# Altium PCB CH32x203C-R1-1v0.PcbDoc
Units mil, origin at the board's own origin, x right, y up, seen from the top; angles counter-clockwise.
Board outline 3733 x 2649.61 mil, 2 copper layers (TopLayer, BottomLayer); 72 components, 72 nets, 336 pads, 444 vias.
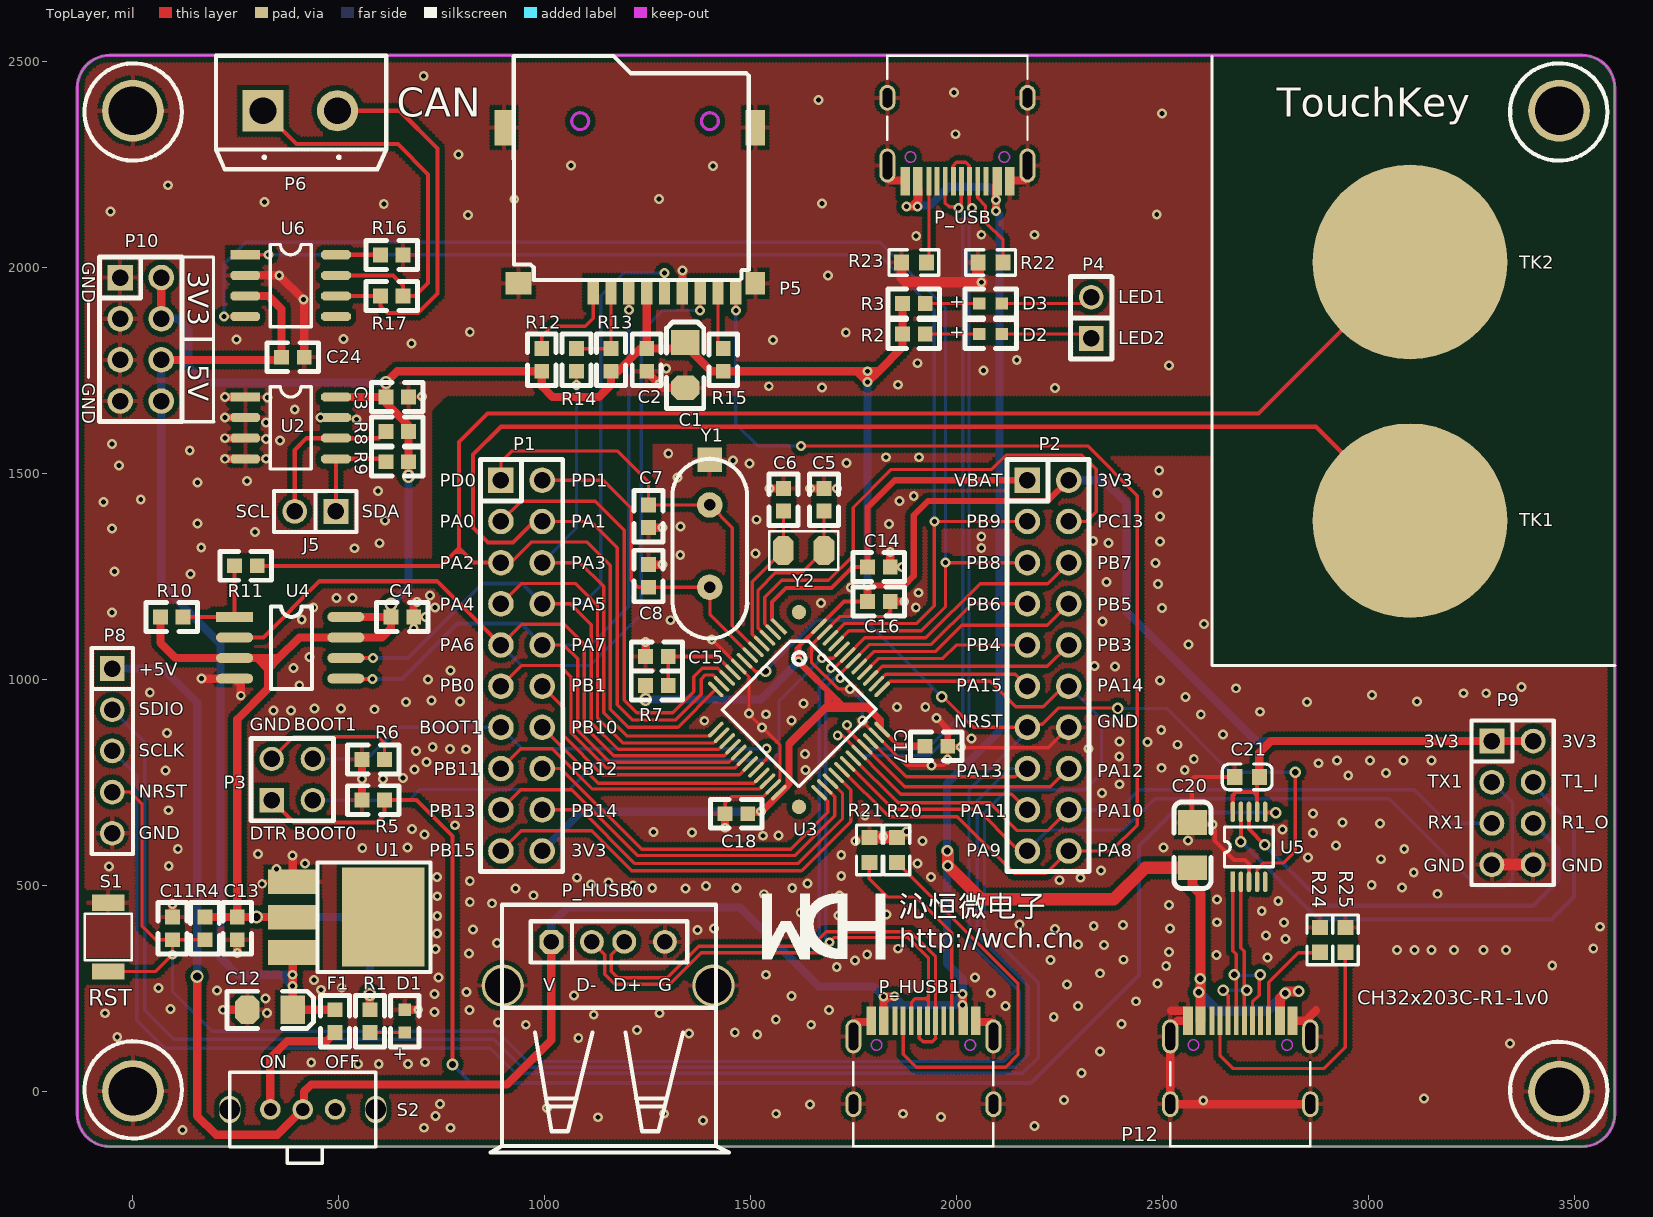
[diagram p0: TopLayer view]
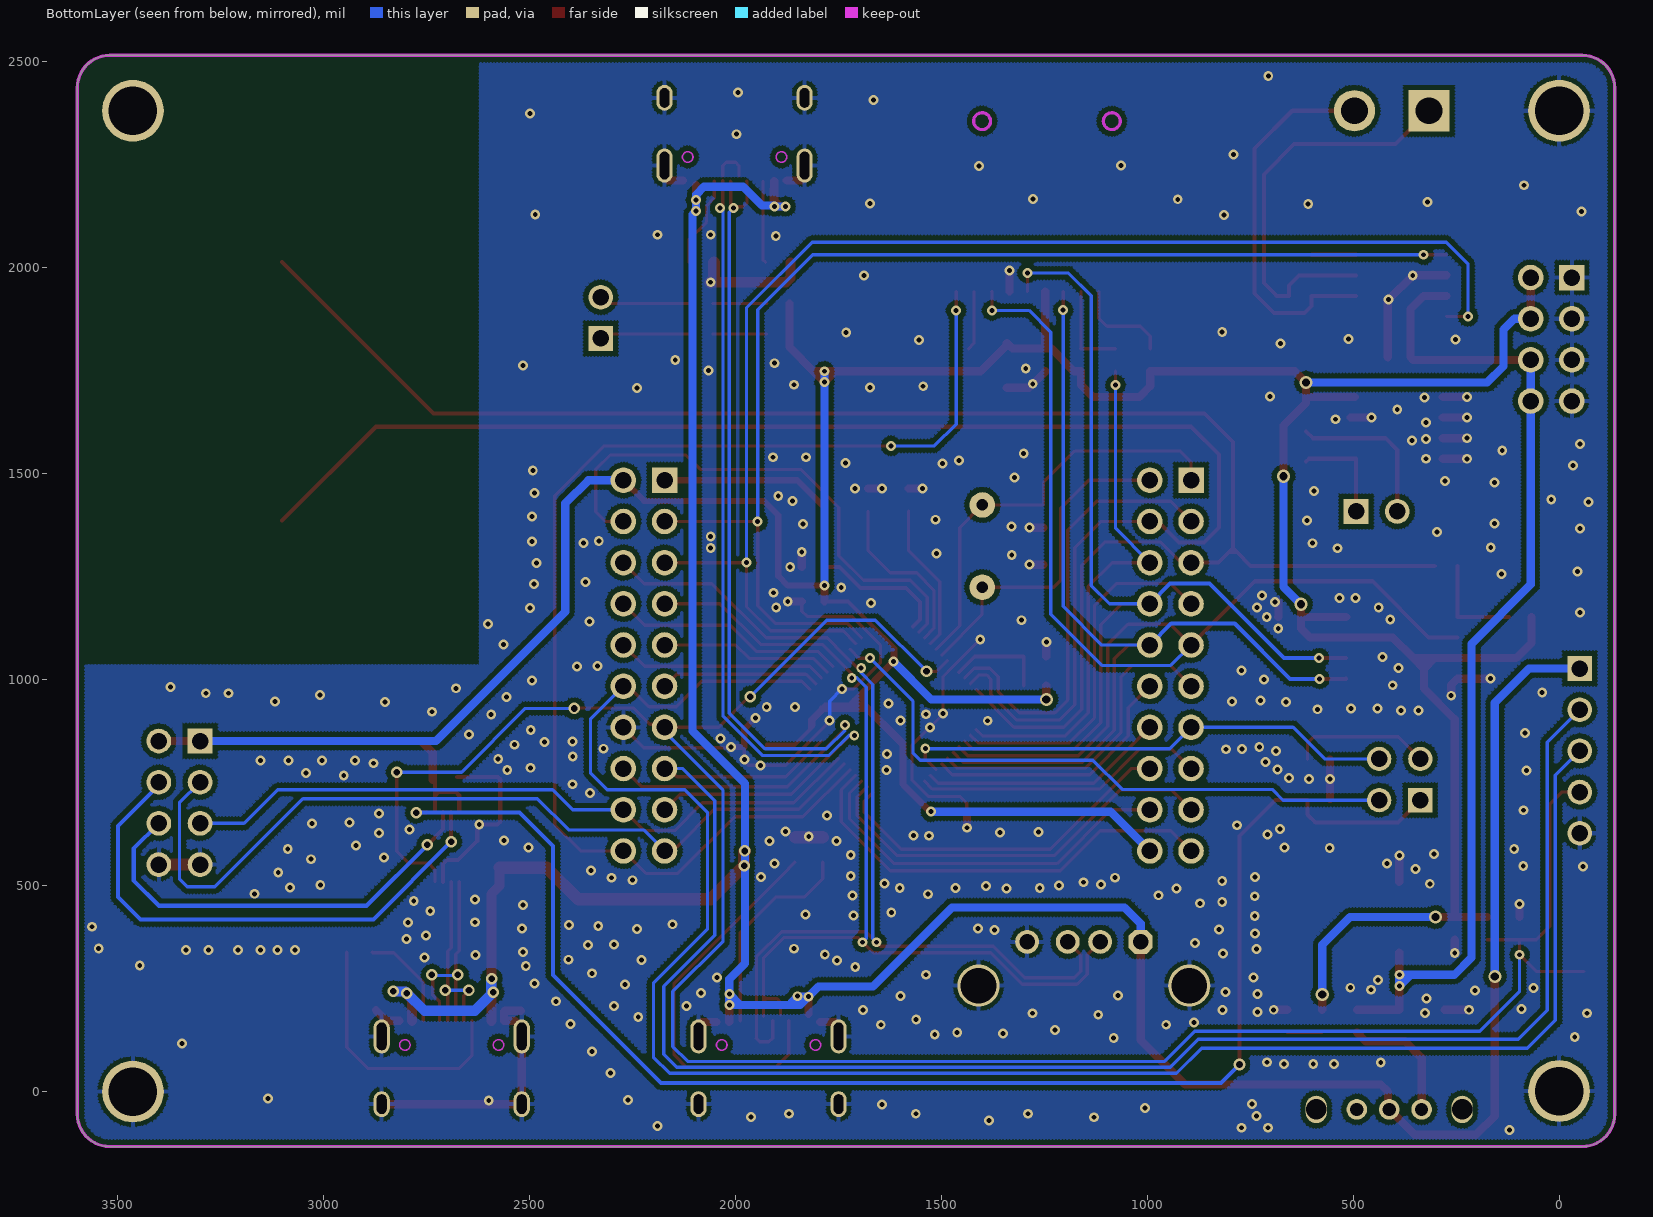
[diagram p1: BottomLayer view, seen from below]

## Layer stack, top to bottom
TopSolder: solder mask 0.4, Solder Resist, Dk 3.5
TopLayer: signal copper 1.4
Dielectric1: dielectric 12.6, FR-4, Dk 4.8
BottomLayer: signal copper 1.4
BottomSolder: solder mask 0.4, Solder Resist, Dk 3.5

## Board outline
-135,-55.87 ccw(c-56.26,-55.87) -56.26,-134.61 3519.26,-134.61 ccw(c3519.26,-55.87) 3598,-55.87 3598,2436.26 ccw(c3519.26,2436.26) 3519.26,2515 -56.26,2515 ccw(c-56.26,2436.26) -135,2436.26

## Design rules (kind name [scope] priority, off if disabled: settings)
Clearance Clearance_1 [InPolygon] p1: gap=12 ignorepadtopadclearanceinfootprint=FALSE
Clearance [All] p2: gap=6 ignorepadtopadclearanceinfootprint=FALSE except(0: Arc-Hole Track-Hole SMDPad-Hole THPad-Hole Via-Hole Fill-Hole Poly-Hole Region-Hole Text-Hole)
ComponentClearance [All] p1 off: gap=10 collisioncheckmode=3 verticalgap=10 showdistances=FALSE
DiffPairsRouting [All] p1: maxlimit=8 minlimit=8 mostfreqgap=8 toplayer_minwidth=15 toplayer_maxwidth=15 toplayer_prefwidth=15 bottomlayer_minwidth=15 bottomlayer_maxwidth=15 bottomlayer_prefwidth=15 substack1={BC7F94EC-5DE3-48DF-A731-132A3A7410ED} toplayer_{bc7f94ec-5de3-48df-a731-132a3a7410ed}_minwidth=15 toplayer_{bc7f94ec-5de3-48df-a731-132a3a7410ed}_maxwidth=15 toplayer_{bc7f94ec-5de3-48df-a731-132a3a7410ed}_prefwidth=15 bottomlayer_{bc7f94ec-5de3-48df-a731-132a3a7410ed}_minwidth=15 bottomlayer_{bc7f94ec-5de3-48df-a731-132a3a7410ed}_maxwidth=15 bottomlayer_{bc7f94ec-5de3-48df-a731-132a3a7410ed}_prefwidth=15 maxuncoupledlength=500
FabricationTestPointUsage TestPointUsage [All] p1: valid=0 allowmultiple=FALSE
FabricationTestpoint Testpoint [All] p1: side=3 testpointundercomponent=TRUE minsize=40 maxsize=100 preferedsize=60 minholesize=20 maxholesize=40 preferedholesize=32 testpointgrid=1 allowsidetop=TRUE allowsidebottom=TRUE usegrid=TRUE gridtolerance=0.01
FanoutControl Fanout_LCC [All] p1 off: bgadir=Out bgaviamode=Centered fanoutstyle=Auto fanoutdirection=Alternating viagrid=1 // Protel DXP Scope 1 Expression Was: IsLCC   Fanout_LCC (Default Rule)
FanoutControl Fanout_BGA [All] p2 off: bgadir=Out bgaviamode=Centered fanoutstyle=Auto fanoutdirection=Alternating viagrid=1 // Protel DXP Scope 1 Expression Was: IsBGA   Fanout_BGA (Default Rule)
FanoutControl Fanout_SOIC [All] p3 off: bgadir=Out bgaviamode=Centered fanoutstyle=Auto fanoutdirection=Alternating viagrid=1 // Protel DXP Scope 1 Expression Was: IsSOIC   Fanout_SOIC (Default Rule)
FanoutControl Fanout_Default [All] p4: bgadir=Out bgaviamode=Centered fanoutstyle=Auto fanoutdirection=Alternating viagrid=1 // Fanout_Default (Default Rule)
FanoutControl Fanout_Small [All] p5 off: bgadir=Out bgaviamode=Centered fanoutstyle=Auto fanoutdirection=Alternating viagrid=1 // Protel DXP Scope 1 Expression Was: (CompPinCount < 5)   Fanout_Small (Default Rule)
HoleSize [All] p1 off: absolutevalues=TRUE maxlimit=100 minlimit=1 maxpercent=80.000 minpercent=20.000
PolygonConnect PolygonConnect_1 [IsVia] p1: connectstyle=Direct reliefconductorwidth=10 reliefentries=4 polygonreliefangle="90 Angle" airgapwidth=10
PolygonConnect [All] p2: connectstyle=Relief reliefconductorwidth=10 reliefentries=4 polygonreliefangle="90 Angle" airgapwidth=10
RoutingVias [All] p1: holewidth=20 width=24 viastyle="Through Hole" minholewidth=12 minwidth=24 maxholewidth=20 maxwidth=35
SilkToSolderMaskClearance SilkscreenOverComponentPads [All] p1: minsilkscreentomaskgap=10 clearancetoexposedcopper=TRUE
SolderMaskExpansion [All] p1: expansion=4 istentingtop=FALSE
Width Width_1 [InNet('GND')] p1: maxlimit=30 minlimit=6 preferedwidth=15 substack1={BC7F94EC-5DE3-48DF-A731-132A3A7410ED}
Width Width_2 [InNetClass('VCC')] p2: maxlimit=30 minlimit=6 preferedwidth=15 substack1={BC7F94EC-5DE3-48DF-A731-132A3A7410ED}
Width [All] p3: maxlimit=220 minlimit=6 preferedwidth=9 substack1={BC7F94EC-5DE3-48DF-A731-132A3A7410ED}
19 further rules are at their usual default settings.

## Components (designator, comment, footprint, x,y, rotation, side; value= is the part's Value field where it differs from the comment)
C1 "NC(10uF)" 3216 1341.05,1817.57 r90 top value=10uF/16V
C2 "0.1uF" 0603#1 1247.55,1802.77 r270 top
C3 "NC(0.1uF)" 0603#1 669.29,1685.24 r180 top
C4 "0.1uF" 0603#1 681.89,1151.39 r180 top
C5 "12pF" 0603#1 1678,1408.39 r90 top
C6 "12pF" 0603#1 1579.6,1408.39 r90 top
C7 "22pF" 0603#1 1252.17,1368.1 r90 top
C8 "22pF" 0603#1 1252.17,1278.2 r270 top
C11 "0.1uF" 0603#1 96,422.39 r270 top
C12 "10uF" 3216 388,197.39 r0 top
C13 "10uF" 0603#1 253.36,422.39 r270 top
C14 "0.1uF" 0603#1 1784,1272.39 r0 top
C15 "0.1uF" 0603#1 1300,1055.39 r180 top
C16 "0.1uF" 0603#1 1839,1188.79 r180 top
C17 "0.1uF" 0603#1 1978.6,837.39 r180 top
C18 "0.1uF" 0603#1 1438,673.39 r0 top
C20 "NC(10uF)" 3216_C 2573,652 r90 top
C21 "NC(0.1uF)" 0603_C 2736,763 r180 top
C24 "NC(0.1uF)" 0603#1 416,1782 r180 top
D1 "POWER" 0603L 660,142.39 r90 top
D2 "LED1   blue" 0603L 2055,1838.27 r0 top
D3 "LED2  blue" 0603L 2055,1912.27 r0 top
F1 "500mA" 0603#1 491,142.39 r90 top
J5 "Header 2" "SIP2 - 40mil" 493,1407.33 r180 top
P1 "Header 10X2" IDC20 893.7,1483.09 r270 top
P2 "Header 10X2" IDC20 2172,1483.09 r270 top
P3 "Header 2X2" HDR2X2 337,706.39 r0 top
P4 "Header 2" "SIP2 - 40mil" 2327,1827.39 r90 top
P5 "TF_自弹" TF_CARD 1117.65,1941.67 r0 top
P6 "Header 2" "PORT2 4.5MM" 316,2380.39 r270 top
P8 "Header 5" "SIP5 - 40mil" -50,1026 r270 top
P9 "HEADER 4x2" IDC8-2.54mm 3300,850 r0 top
P10 "Header 4X2" IDC8 -31,1975.39 r0 top
P12 "TYPE-C" TYPE-C-Receptacle-2.0 2688.92,171 r0 top
P_HUSB0 "USB_A" USBA-l 1016,362.39 r0 top
P_HUSB1 "TYPE-C" TYPE-C-Receptacle-2.0 1919.5,171 r0 top
P_USB "TYPE-C" TYPE-C-Receptacle-2.0 2002.1,2209 r180 top
R1 "1K" 0603#1 575.5,142.39 r90 top
R2 "1K" 0603#1 1869,1838.27 r0 top
R3 "1K" 0603#1 1869,1912.27 r0 top
R4 "10K" 0603#1 174.68,367.39 r90 top
R5 "10K" 0603#1 611,706.39 r180 top
R6 "10K" 0603#1 611,805.39 r180 top
R7 "0Ω" 0603#1 1245,985 r0 top
R8 "NC(10K)" 0603#1 669.29,1601.74 r180 top value=10K
R9 "NC(10K)" 0603#1 669.29,1528.24 r180 top value=10K
R10 "10K" 0603#1 122,1151.39 r180 top
R11 "NC(0Ω)" 0603#1 247,1275.39 r0 top
R12 "NC(10K)" 0603#1 992.75,1802.77 r270 top
R13 "NC(10K)" 0603#1 1161.15,1802.77 r270 top
R14 "NC(0Ω)" 0603#1 1076.95,1802.77 r270 top
R15 "NC(10K)" 0603#1 1433.55,1747.77 r90 top
R16 "NC(0Ω)" 0603#1 656.17,2030 r180 top
R17 "NC(120Ω)" 0603#1 656.17,1930.7 r180 top
R20 "NC(5.1K)" 0603#2 1855.1,555.43 r90 top
R21 "NC(5.1K)" 0603#2 1788.1,555.43 r90 top
R22 "NC(5.1K)" 0603#2 2112.81,2012 r180 top
R23 "NC(5.1K)" 0603#2 1926.81,2012 r180 top
R24 "NC(5.1K)" 0603#2 2882,337 r90 top
R25 "NC(5.1K)" 0603#2 2944,337 r90 top
S1 "KEY" 贴片按键 -60,290.39 r90 top
S2 "SW" KEY2 255,-44.61 r0 top
TK1 "KEY6" KEY68 3101,1424.39 r90 top
TK2 "KEY7" KEY68 3101,2052.39 r90 top
U1 "1117_3V3" SOT-223 388,508.39 r270 top
U2 "NC(24C02)" SOP8 273.2,1685.24 r270 top
U3 "CH32F203CxT" LQFP48 1568.6,1128.39 r225 top
U4 "W25Q16" "016 SO-8" 257,1151.39 r0 top
U5 "NC(CH340X)" MSOP10 2670.63,508 r0 top
U6 "NC(TJA1050)" SOP8 273.2,2030.7 r270 top
Y1 "8M" XT62/28 1400.47,1223.2 r0 top
Y2 "32.768k" FC-135 1678,1312.39 r180 top

## Footprints (in the part's own frame and the unit in brackets; to place one, negate y for a bottom-side part, rotate by r counter-clockwise, add the part's x,y. Pads: shape width x height; smd on the part's side, far side on the other; paste and mask are expansions set on the pad)
"016 SO-8" [mil]
  rect 90x24 smd: 1(-10,0)
  oval 90x24 smd: 2(-10,-50) 3(-10,-100) 4(-10,-150) 5(260,-150) 6(260,-100) 7(260,-50) 8(260,0)
  silkscreen extent 78,-175 178,25
0603#1 [mil]
  rect 36x36 smd: 1(0,0) 2(55,0)
  silkscreen extent -35,-35 90,35
0603#2 [mil]
  rect 36.61x38.58 smd: 1(0,0) 2(60.63,0)
  silkscreen extent -30,-31 91,31
0603_C [mm]
  rect 0.93x0.98 smd: 1(0,0) 2(1.54,0)
  silkscreen extent -0.76,-0.79 2.31,0.79
0603L [mil]
  rect 30x30 smd: 1(0,0) 2(55,0)
  silkscreen extent -35,-35 90,35
3216 [mil]
  rect 60x70 smd: 1(0,0)
  oct 60x70 smd: 2(-110,0)
  silkscreen extent -160,-45 50,45
3216_C [mil]
  rect 60x70 smd: 1(0,0) 2(-110,0)
  silkscreen extent -160,-45 50,45
FC-135 [mil]
  oct 50x70 smd: 1(0,0) 2(98.43,0)
  silkscreen extent -35,-47 133,47
HDR2X2 [mm] "Connector; Header; 2x2 Position"
  rect 1.5x1.5 hole 1.016: 1(0,0)
  round 1.5 hole 1.016: 2(0,2.54) 3(2.54,0) 4(2.54,2.54)
  silkscreen extent -1.27,-1.27 3.81,3.81
IDC8 [mil]
  rect 62x62 hole 40: 1(0,0)
  round 62 hole 40: 2(100,0) 3(0,-100) 4(100,-100) 5(0,-200) 6(100,-200) 7(0,-300) 8(100,-300)
  silkscreen extent -50,-350 150,50
IDC8-2.54mm [mil]
  rect 60x60 hole 40: 1(0,0)
  round 60 hole 40: 2(100,0) 3(0,-100) 4(100,-100) 5(0,-200) 6(100,-200) 7(0,-300) 8(100,-300)
  silkscreen extent -50,-350 150,50
IDC20 [mil]
  rect 62x62 hole 40: 1(0,0)
  round 62 hole 40: 2(0,100) 3(100,0) 4(100,100) 5(200,0) 6(200,100) 7(300,0) 8(300,100) 9(400,0) 10(400,100) 11(500,0) 12(500,100) 13(600,0) 14(600,100) 15(700,0) 16(700,100) 17(800,0) 18(800,100) 19(900,0) 20(900,100)
  silkscreen extent -50,-50 950,150
KEY2 [mm]
  oval 1.3x1.7 hole 1.27: 0(-0.5,0) 0(8.5,0)
  round 1.27 hole 0.813: 1(4,0) 2(2,0) 3(6,0)
  silkscreen extent -0.51,-3.32 8.5,2.29
KEY68 [mm]
  round 12 smd: 1(-1,0)
LQFP48 [mm]
  round 0.889 smd: 0(-1.496,0.254) 0(6.996,8.746)
  rect 0.229x1.27 smd: 1(0,0)
  oval 0.229x1.27 smd: 2(0.5,0) 3(1,0) 4(1.5,0) 5(2,0) 6(2.5,0) 7(3,0) 8(3.5,0) 9(4,0) 10(4.5,0) 11(5,0) 12(5.5,0) 25(5.5,9) 26(5,9) 27(4.5,9) 28(4,9) 29(3.5,9) 30(3,9) 31(2.5,9) 32(2,9) 33(1.5,9) 34(1,9) 35(0.5,9) 36(0,9)
  oval 1.27x0.229 smd: 13(7.25,1.75) 14(7.25,2.25) 15(7.25,2.75) 16(7.25,3.25) 17(7.25,3.75) 18(7.25,4.25) 19(7.25,4.75) 20(7.25,5.25) 21(7.25,5.75) 22(7.25,6.25) 23(7.25,6.75) 24(7.25,7.25) 37(-1.75,7.25) 38(-1.75,6.75) 39(-1.75,6.25) 40(-1.75,5.75) 41(-1.75,5.25) 42(-1.75,4.75) 43(-1.75,4.25) 44(-1.75,3.75) 45(-1.75,3.25) 46(-1.75,2.75) 47(-1.75,2.25) 48(-1.75,1.75)
  silkscreen extent -0.65,1.15 6.11,7.86
MSOP10 [mil]
  rect 11x50 smd: 1(0,0)
  oval 11x50 smd: 2(19.68,0) 3(39.37,0) 4(59.06,0) 5(78.74,0) 6(78.74,170) 7(59.06,170) 8(39.37,170) 9(19.68,170) 10(0,170)
  silkscreen extent -20,37 98,133
"PORT2 4.5MM" [mil]
  rect 100x100 hole 65: 1(0,0)
  round 100 hole 65: 2(0,181.1)
  silkscreen extent -133,-114 142,299
"SIP2 - 40mil" [mil]
  rect 60x60 hole 40: 1(0,0)
  round 60 hole 40: 2(100,0)
  silkscreen extent -50,-50 150,50
"SIP5 - 40mil" [mil]
  rect 60x60 hole 40: 1(0,0)
  round 60 hole 40: 2(100,0) 3(200,0) 4(300,0) 5(400,0)
  silkscreen extent -50,-50 450,50
SOP8 [mil]
  rect 22x72 smd: 1(0,0)
  oct 22x72 smd: 2(50,0) 3(100,0) 4(150,0) 5(150,220) 6(100,220) 7(50,220) 8(0,220)
  silkscreen extent -25,60 175,160
SOT-223 [mil]
  rect 60x120 smd: 1(0,0) 2(86,0) 3(172,0)
  rect 240x200 smd: ""(86,220)
  silkscreen extent -47,60 219,335
TF_CARD [mm]
  rect 0.7x1.6 smd: 1(0,0) 2(1.1,0) 3(2.2,0) 4(3.3,0) 5(4.4,0) 6(5.5,0) 7(6.6,0) 8(7.7,0) 9(8.8,0)
  rect 1.2x2.2 smd: 10(-5.5,10.1) 10(10,10.1)
  rect 1.6x1.4 smd: 10(-4.6,0.5)
  rect 1.2x1.4 smd: 10(10,0.5)
  KeepOutLayer circle w0.2: c-0.8,10.5 r0.52
  KeepOutLayer circle w0.2: c7.2,10.5 r0.52
  silkscreen extent -4.9,0.7 9.59,14.52
TYPE-C-Receptacle-2.0 [mm]
  oval 1x1.6 hole 0.6 slot 1.2 at 90 deg: 0(-4.32,-5.15) 0(4.32,-5.15)
  oval 1x2.1 hole 0.6 slot 1.7 at 90 deg: 0(-4.32,-0.97) 0(4.32,-0.97)
  rect 0.6x1.75 smd: A1(-3.225,0) A4(-2.45,0) B1(3.225,0) B4(2.45,0)
  rect 0.3x1.75 smd: A5(-1.25,0) A6(-0.25,0) A7(0.25,0) A8(1.25,0) B5(1.75,0) B6(0.75,0) B7(-0.75,0) B8(-1.75,0)
  KeepOutLayer circle w0.1: c-2.89,-1.5 r0.325
  KeepOutLayer circle w0.1: c2.89,-1.5 r0.325
  silkscreen extent -4.32,-7.75 4.32,-2.55
USBA-l [mm]
  oct 1.473x1.473 hole 0.965: 1(0,0)
  round 1.473 hole 0.965: 2(2.5,0) 3(4.5,0) 4(7,0)
  round 2.6 hole 2.2: 5(-3,-2.7) 6(10,-2.7)
  silkscreen extent -3.75,-12.99 10.95,2.29
XT62/28 [mil]
  rect 60x60 smd: 0(0,310)
  round 62 hole 28: 1(0,0) 2(0,200)
  silkscreen extent -91,-124 91,312
贴片按键 [mm]
  rect 1x2 smd: 1(0,0) 3(4.242,0)
  silkscreen extent 0.69,-1.45 3.55,1.45

## Part data
C1: library part ELECTRO1, "Electrolytic Capacitor"
C2 C3 C5 C6 C7 C8 C11 C14 C15 C16 C17 C18: library part Cap, "Capacitor", Published=8-Jun-2000, Publisher="Altium Limited"
  C2: Revision="July-2002: Re-released for DXP Platform."
  C3 C5 C6 C7 C8 C11 C14 C15 C16 C17 C18: LatestRevisionDate=17-Jul-2002, LatestRevisionNote="Re-released for DXP Platform.", PackageReference=RAD-0.3
C4 C12 C13 C20 C21 C24: library part CAP, "Capacitor"
D1 D2 D3: library part LED0, "Typical INFRARED GaAs LED", LatestRevisionDate=08-Jul-2005, LatestRevisionNote="Mech Layer 1 removed.", PackageReference=LED-0, Published=8-Jun-2000, Publisher="Altium Limited"
F1: library part FUSE1, "Fuse"
J5 P4 P8: library part 2HEAD
P1 P2: "Header, 10-Pin, Dual row", LatestRevisionDate=17-Jul-2002, LatestRevisionNote="Re-released for DXP Platform.", Publisher="Altium Limited"
P3: "Header, 2-Pin, Dual row", LatestRevisionDate=17-Jul-2002, LatestRevisionNote="Re-released for DXP Platform.", Publisher="Altium Limited"
P6: "Header, 2-Pin", LatestRevisionDate=17-Jul-2002, LatestRevisionNote="Re-released for DXP Platform.", Publisher="Altium Limited"
P9 P10: "Header, 4-Pin, Dual row"
  P10: LatestRevisionDate=17-Jul-2002, LatestRevisionNote="Re-released for DXP Platform.", Publisher="Altium Limited"
P12 P_HUSB1 P_USB: library part TYPE-C1
P_HUSB0: library part USB, "USB Port"
R1 R2 R3: library part "Res Semi", "Semiconductor Resistor", LatestRevisionDate=17-Jul-2002, LatestRevisionNote="Re-released for DXP Platform.", PackageReference=AXIAL-0.5, Published=8-Jun-2000, Publisher="Altium Limited"
R4 R5 R6 R7 R8 R9 R20 R21 R22 R23 R24 R25: library part Res2, "Resistor"
  R4 R5 R6 R7 R8 R9: LatestRevisionDate=17-Jul-2002, LatestRevisionNote="Re-released for DXP Platform.", PackageReference=AXIAL-0.4, Published=8-Jun-2000, Publisher="Altium Limited"
R10 R13: library part DZ
R11 R12 R14 R15 R16 R17: library part RES2
TK1 TK2: library part KEY
U1: library part LM1117_3.3V
U2: library part 24C256
U3: "ARM M3 LMD-MCU, 144MHz, 2*USB FS, CAN"
U4: library part Pro89C.tmp_25F512_2
U5: library part CH340X, "USB to TTL Serial / UART"
U6: library part Component_1
Y1 Y2: library part XTAL, "Crystal Oscillator", LatestRevisionDate=17-Jul-2002, LatestRevisionNote="Re-released for DXP Platform.", PackageReference=R38, Published=8-Jun-2000, Publisher="Altium Limited"

## Free pads (board coordinates)
  round 150 hole 118.11: 0(0,0) 0(0,2380.39) 0(3463,-1.26) 0(3463,2380.39)

## Via types
v1: diameter 24, hole 12, TopLayer to BottomLayer, tented both sides, 419 vias
v2: diameter 28, hole 16, TopLayer to BottomLayer, tented both sides, 18 vias
v3: diameter 32, hole 20, TopLayer to BottomLayer, tented both sides, 7 vias

## Nets (pads, with @x,y where several pads share a name; then routed paths per layer and width w, separated by ;. In a path a pad name is that pad's centre, name@x,y a point inside that pad or via, vN(x,y) a via of type N, cw(c..) or ccw(c..) an arc to the next point about the centre after c; other vN are vias at no path point)
3V3: C1.1 C2.1 C3.2 C4.2 C13.1 C16.2 C17.2 C18.2 C21.1 P1.20 P2.2 P5.4 P9.1 P9.2 P10.2 P10.4 R1.2 R2.1 R3.1 R4.2 R7.1 R8.1 R9.1 R10.2 R12.2 R13.2 R15.1 U1.2 U2.8 U3.24 U3.36 U3.48 U4.3 U4.7 U4.8 U5.7 U5.10 | length 12605.3
  TopLayer w10: 1672.6,982.39 1684,970.99 ; C16.2 1726.44,1188.79 U3.48 1618,1080.36 ; 1792.6,931.39 1790,931.39 ; C17.2@1923.6,841.39 C17.2@1917,841.39 ; U5.10 2670.63,717.63 2679,726 2720.68,726 ; U5.7 2729.68,717 ; C21.1@2739,766 C21.1 2735,762 2729.68,756.69 2729.68,726 ; v1@1517.26,673.39 1526,673.39 1589,736.39 ; v1@1517.26,673.39 v1@1525.26,681.39 ; v1@1517.26,673.39 C18.2 1501,681.39 v1@1525.26,681.39 ; v1@1525.26,681.39 U3.24 1589,745.13 ; 1589,736.39 1589,745.13 ; 1589,736.39 1596.6,743.99 1596.6,838.99 ; 1589,745.13 1589,831.39 ; 1589,831.39 1589,845.39 1594.85,851.25 ; 1589,831.39 1596.6,838.99 ; 1594.85,851.25 1596.6,849.5 1596.6,838.99 ; 1594.85,851.25 1684,940.39 ; 1596.6,838.99 1683,925.39 ; v1@1618,1036.99 v1@1618,1044.99 ; v1@1618,1036.99 1611.9,1043.09 1611.9,1074.26 1618,1080.36 ; v1@1618,1036.99 1641,1013.99 ; v1@1618,1044.99 1712.6,950.39 ; v1@1618,1044.99 1618,1080.36 ; 1641,1013.99 1684,970.99 ; 1641,1013.99 1684,970.99 ; 1683,925.39 1728.6,925.39 ; 1683,925.39 1691.5,933.89 ; 1684,940.39 1684,963.39 ; 1684,940.39 1690.5,946.89 ; 1684,940.39 1698,940.39 ; 1684,963.39 1690.5,956.89 1690.5,946.89 ; 1684,963.39 1684,970.99 ; 1684,970.99 1699.6,955.39 ; 1684,970.99 1699.6,955.39 ; 1690.5,946.89 1699,955.39 1699.6,955.39 ; 1691.5,933.89 1720.1,933.89 ; 1691.5,933.89 1698,940.39 ; 1698,940.39 1713.6,940.39 1720.1,933.89 ; 1698,940.39 1706.3,948.69 ; 1699.6,955.39 1706.3,948.69 ; 1699.6,955.39 1706.3,948.69 ; 1706.3,948.69 1708.56,946.44 1729.6,925.39 ; 1706.3,948.69 1708,950.39 1712.6,950.39 ; 1712.6,950.39 1724,938.99 ; 1720.1,933.89 1728.6,925.39 ; 1724,938.99 1782.4,938.99 1790,931.39 ; 1724,938.99 1731.6,931.39 ; 1728.6,925.39 1729.6,925.39 ; 1729.6,925.39 1737.6,925.39 ; 1731.6,931.39 1737.6,925.39 ; 1731.6,931.39 1790,931.39 ; 1737.6,925.39 1785,925.39 ; 1785,925.39 1810,900.39 1810,886.99 U3.36 ; 1785,925.39 1796,925.39 ; 1790,931.39 1796,925.39 ; 1796,925.39 1819.15,902.24 U3.36 ; U3.36 1855.6,841.39 ; 1855.6,841.39 1859.6,837.39 ; 1855.6,841.39 C17.2@1917,841.39 ; 1859.6,837.39 1859.8,837.19 ; 1859.6,837.39 C17.2@1913,837.39 ; 1859.8,837.19 1863.6,833.39 1909,833.39 C17.2@1912.8,837.19 ; 1859.8,837.19 C17.2@1912.8,837.19 ; C17.2@1912.8,837.19 C17.2@1913,837.39 ; C17.2@1912.8,837.19 1923.4,837.19 C17.2 C17.2@1913,837.39 ; C17.2@1913,837.39 C17.2@1917,841.39 ; 2720.68,726 2729.68,726 ; 2720.68,726 2729.68,717 ; 2729.68,717 2729.68,726
  TopLayer w15: v1(1784,1227.39) 1872.39,1227.39 1896,1251 1896,1398 1930.99,1432.99 2221.9,1432.99 P2.2
  TopLayer w20: R10.2 67,1088.39 104,1051.39 U4.3 302,1051.39 ; P10.4 P10.2 ; R4.2 C13.1 ; U1.2 v3(300,422.39) C13.1 ; U2.8@496.02,1685.24 C3.2 ; U4.8 C4.2 ; v3(575,234.39) 575,197.89 R1.2 ; v3(627,1182) 627,1151.51 C4.2 ; v3(669.29,1493) R9.1 R8.1 669.29,1616.11 614.29,1671.11 C3.2 ; R12.2@992.38,1747.39 R12.2 ; v3(1245,951.1) R7.1 ; P5.4 C2.1@1247.57,1802.79 ; C16.2 v1(1784,1227.39) ; R3.1 R2.1 1869,1806.39 1810.38,1747.77 ; C21.1@2735,756 2735,762 2735,822 2763,850 ; 2859,850 2763,850 ; P9.2 P9.1 2763,850 ; C13.1 253.36,902.76 328,977.39 328,1025.39 ; 302,1051.39 328,1025.39 ; 302,1051.39 328,1051.39 ; 328,1025.39 354,1051.39 ; 328,1025.39 328,1051.39 ; 328,1051.39 354,1051.39 ; 354,1051.39 404,1101.39 U4.7 605,1101.39 626.89,1123.28 C4.2 ; C3.2 v3(614.29,1720.29) 641.77,1747.77 R12.2 ; R12.2 992.75,1711.64 1019,1685.39 1132,1685.39 1161.15,1714.54 R13.2 1177.65,1747.77 1232.65,1802.77 C2.1 ; C2.1 1327.25,1802.77 1341.05,1816.57 1341.05,1811.34 1404.62,1747.77 R15.1 1757.62,1747.77 ; 1757.62,1747.77 v1(1784,1721.39) ; 1757.62,1747.77 v1(1784,1747.77) ; v1(1784,1721.39) 1810.38,1747.77 ; v1(1784,1721.39) v1(1784,1747.77) ; v1(1784,1747.77) 1810.38,1747.77
  BottomLayer w20: P10.4 108.61,1875.39 135,1849 135,1760 174.71,1720.29 v3(614.29,1720.29) ; v3(300,422.39) 508,422.39 575,355.39 v3(575,234.39) ; v3(627,1182) 669.29,1224.29 v3(669.29,1493) ; P1.20 1089,678.39 v1(1525.26,678.39) ; v3(1245,951.1) 1524.51,951.1 v1(1616.6,1043.19) ; v1(1784,1227.39) v1(1784,1721.39) v1(1784,1747.77) v1@1784,1748.39 ; P2.2 2357.3,1483.09 2413,1427.39 2413,1164 2727,850 P9.1
5V: C12.1 C24.2 F1.2 P10.6 P10.8 U1.3 U6.3 | length 2523.1
  TopLayer w20: P10.6 354.39,1775.39 C24.2 361,1899 329.3,1930.7 U6.3 ; U1.3 v1(388,282.39) v1(388,255.39) C12.1 F1.2
  BottomLayer w20: P10.6 P10.8 69,1230.11 213,1086.11 213,324 254.61,282.39 361,282.39 ; 361,282.39 v1(388,282.39) v1(388,255.39) 361,282.39
+5V: C20.2 P8.1 P12.A4 P12.B4 P_HUSB0.1 P_HUSB1.A4 P_HUSB1.B4 P_USB.A4 P_USB.B4 S2.1 | length 7887.2
  TopLayer w20: v3(156,278) 156,-60 202,-106 351.09,-106 415.51,-41.57 415.51,-1.57 433.09,16 908,16 1016,124 P_HUSB0.1 ; P_HUSB1.A4@1822.79,187.54 1822.79,216.97 ; v1(1849,230.39) 1847.79,229.18 1835,229.18 ; v1(1878,2148) 1891.84,2148 ; v1(1905,2148) 1891.84,2148 ; P_USB.B4 1905.64,2161.81 ; P_USB.B4@1906.84,2188.94 1906.84,2163 1905.64,2161.81 ; P_HUSB1.B4@2014.76,167.54 v1(2014.76,209.18) v1(2014.76,235.39) ; v1(2095.84,2137.39) v1(2095.84,2163.33) P_USB.A4@2095.81,2199.94 ; 1822.79,216.97 1835,229.18 ; 1822.79,216.97 v1(1822.79,229.18) 1835,229.18 ; 1891.84,2148 1905.64,2161.81
  TopLayer w25: C20.2 2573.02,497.98 2592.46,478.54 P12.A4 ; P12.B4 2785.38,223.36 ; v2(2831,242) 2802,242 v2(2798,238) ; 2785.38,223.36 2785.38,225.38 v2(2798,238) ; 2785.38,223.36 2798,235.98 v2(2798,238)
  TopLayer w30: v2(1977,583) 1979,581 v2(1979,547) 2060,466 2382,466 2458,542 C20.2
  BottomLayer w20: P8.1 73,1026 156,943 v3(156,278) ; P_HUSB0.1 1016,407 1055,446 1474,446 1597,323 1666,254 1797.97,254 v1(1822.79,229.18) ; v1(1878,2148) v1(1905,2148) ; v1@1905.75,2150.15 1935.77,2150.15 1981.62,2196 2076,2196 2095.07,2176.93 2095.07,2164.1 v1(2095.84,2163.33) v1(2095.84,2137.39) 2095.84,2136.31 2104,2128.15 2104,874 1977,747 v2(1977,583) 1977,310 2014.76,272.24 v1(2014.76,235.39) ; v1(1822.79,229.18) 1842.79,209.18 1865,209.18 ; v1(1822.79,229.18) 1823.39,229.79 1848.39,229.79 v1(1849,230.39) 1849,229.31 1865,213.31 1865,209.18 ; 1865,209.18 1988.55,209.18 ; 1988.55,209.18 v1(2014.76,235.39) ; 1988.55,209.18 v1(2014.76,209.18) v1(2014.76,235.39)
  BottomLayer w25: v2(2588,240) v2@2592.57,235.43 ; v2(2592,273) 2592.57,272.43 v2@2592.57,235.43 ; 2605,223 v2@2592.57,235.43 ; v2(2831,242) 2802,242 v2(2798,238) 2755,195 2633,195 v2@2592.57,235.43
BOOT0: P3.3 U3.44 | length 1510.3
  TopLayer w8: v1(1672.9,1051.29) 1700.29,1051.29 U3.44
  BottomLayer w8: P3.3 670.39,706.39 696.39,732.39 1061,732.39 1132,803.39 1551,803.39 1569,821.39 1569,947.39 v1(1672.9,1051.29)
BOOT1: P1.13 P3.4 U3.20 | length 1217
  TopLayer w8: U3.20 1539,806.49 v1(1539,831.39)
  BottomLayer w8: P3.4 569.39,806.39 646.09,883.09 P1.13 945.4,831.39 v1(1539,831.39)
CAN0H: P6.1 R17.1 U6.7 | length 1001.2
  TopLayer w10: P6.1 397,2299.39 643.61,2299.39 717,2226 717,1962.2 685.5,1930.7 R17.1 656.17,1956.14 631.61,1980.7 U6.7
CAN0L: P6.2 R17.2 U6.6 | length 931.1
  TopLayer w10: U6.6 R17.2 601.17,1906.43 618.7,1888.9 692.6,1888.9 740,1936.3 740,2288.39 648,2380.39 P6.2
DTR: P3.1 R5.1 U5.6 | length 3595.3
  TopLayer w10: P3.1 391.39,652 592,652 611,671 R5.1 688.61,706.39 776,619 v2(776,64.55) ; U5.6 2749.37,676.46 2749.83,676 v2(2775,676)
  BottomLayer w10: v2(776,64.55) 820.55,20 2181,20 2443,282 2443,595 2524,676 v2(2775,676)
GND: C1.2 C2.2 C3.1 C4.1 C5.2 C6.2 C7.1 C8.1 C11.1 C12.2 C13.2 C14.2 C15.2 C16.1 C17.1 C18.1 C20.1 C21.2 C24.1 D1.2 P2.14 P5.6 P5.10 P8.5 P9.7 P9.8 P10.1 P10.3 P10.5 P10.7 P12.0 P12.A1 P12.B1 P_HUSB0.4 P_HUSB0.5 P_HUSB0.6 P_HUSB1.0 P_HUSB1.A1 P_HUSB1.B1 P_USB.0 P_USB.A1 P_USB.B1 pad.0@0,0 pad.0@0,2380.39 pad.0@3463,-1.26 R5.2 R6.2 R16.1 R20.2 R21.2 R22.2 R23.2 R24.2 R25.2 S1.3 U1.1 U2.1 U2.2 U2.3 U2.4 U2.7 U3.8 U3.23 U3.35 U3.47 U4.4 U5.3 U6.2 Y1.0 | length 5112.5
  TopLayer w8: v1(1405.56,1096.56) U3.8 1496,1006.12 1496,915.39 1571,840.39 1571,754.97 U3.23 1531.42,715.39 1455,715.39 1438,698.39 C18.1 ; v1(1741.6,976.39) 1712.6,976.39 1647.6,1041.39 1647.6,1082.12 1717.88,1152.39 1826,1152.39 1839,1165.39 C16.1 ; v1(1771.18,899.97) 1771.18,897.97 U3.35 1878.15,791 v1(1939,791) 1968.91,791 1975.16,797.25 1975.16,797.61 1975.55,797.99 1978.6,797.99 C17.1@1978.6,835.39 ; v1(2010.29,835.02) 2011.92,833.39 2222.3,833.39 P2.14
  TopLayer w10: C21.2 2576.86,763 2571,757.14 2571,654 C20.1 2577.61,647.39 2613.61,647.39 2627,634 2627,607.39 2673.39,561 2700,561 2710,551 U5.3
  TopLayer w15: v1(1951.7,905.9) 1978.6,879 C17.1 ; C17.1@1978.6,835.39 v1@2010.29,835.39
  TopLayer w20: C11.1 v1(96,454.39) ; v1(167,1001.39) U4.4 262,986.39 v1(262,960) ; v1(219.08,197.39) C12.2 ; v1(223.4,1535.24) U2.4 U2.4@282.32,1535.24 ; v1(223.4,1585.24) U2.3 U2.3@282.32,1585.24 ; v1(223.4,1635.24) U2.2 U2.2@282.32,1635.24 ; v1(223.4,1685.24) U2.1 U2.1@282.32,1685.24 ; v1(253.36,335.03) C13.2 ; U6.2 v1(355.3,1980.7) v1(414,1922) 416,1920 C24.1 ; U1.1 v1(388,572.39) ; v1(455.64,1635.24) U2.7 U2.7@506.32,1635.24 ; R5.2@556,710 R6.2 ; D1.2 v1(693,197.39) ; v1@681.6,1187.99 681.6,1151.68 C4.1 ; C15.2 v1(1245,1090.39) ; C2.2 1287.75,1707.57 C1.2 ; C8.1 v1(1286.17,1278.2) ; C7.1 v1(1286.17,1368.1) ; P5.6 v1(1334.19,1992.58) ; v1(1438,639.39) C18.1 ; v1(1545.6,1463.39) C6.2 ; v1(1644,1463.39) C5.2 ; P_HUSB1.0@1750,159.39 1758.15,167.54 P_HUSB1.A1@1794.29,167.54 ; P_USB.0@1831.05,2219.09 1839.2,2210.94 P_USB.B1@1875.34,2210.94 ; C16.1 v1(1873,1188.79) ; C14.2 v1(1839,1309.39) ; P_HUSB1.B1@2046.26,167.54 2082.4,167.54 P_HUSB1.0@2090.55,159.39 ; P_USB.A1@2127.31,2210.94 2163.45,2210.94 P_USB.0@2171.6,2219.09 ; P12.0@2512,-35 2518.84,-28.16 P12.0@2518.84,132.81 ; P12.0@2517,155 2520.58,155 2536.58,171 P12.A1 2561.95,193.19 2560.14,195 2521,195 ; P12.0@2518.84,-31.76 2855.76,-31.76 P12.0@2860,-36 ; P12.B1 2841.27,171 ; P12.0@2865,150 2862.27,150 2841.27,171 ; 2873,196 2848,171 2841.27,171
  TopLayer w25: R23.2 1866.18,1974.98 1877.17,1964 v1(2060,1964)
  TopLayer w30: R21.2 R20.2 ; R22.2 2052.18,1971.82 v1(2060,1964) ; P9.7 P9.8
  BottomLayer w8: v1(1741.6,976.39) 1771.18,946.81 v1(1771.18,899.97)
  other v1: 120.8,-94.8 707,-89 771,-89 2189,-85 1384,-71.61 1129,-63.61 1962,-62.61 735,-60.61 1290,-55 1562,-55 1870,-55 1005.6,-41 1644,-33 746,-31 2599,-22.61 2261,-21.61 3135,-17.61 2303,44 547,66 597,66 668,66 433,69 709,70 2348,96 3343.9,115.3 1081.5,128.6 -38,131 1516,137 1350,140 1461.5,142.3 1224.12,148.39 954,161 1647,161 2400,163 886.1,166.97 1561,174 2236,180 1119,185.39 -68,189 1279,189 326,190 732,192 817,197 1690,197 91,199 2119,207 2295,207 2436,218 322,224.39 1599,231 1071,232 732,236 2084,238 810,241 204.5,244.4 457,246 62,250 507,251 2268,259 2488,261 440,270 742,276 2045,276 1537.2,282.5 2348,286 1709,301 2509,304 3446.4,305.3 1753,317 2228,318 2405,319 2755,324 2631,330 1783,332 816,334 2516,338 3069,343 3112,343 3153,343 3208,343 3279,343 3334,343 735,345 1858,345.69 3546,346 2358,355 2295,356 884.1,359.2 2799,369 2751,378 738,383 1371.1,391.5 826,392 2239,393.39 1411,395 2518,395 3562,399 2333,401 2404,403 2153,405 2795,409 2632,410 739,425 1713,426 1830,429 1621.5,433.7 2741,437 2516,452 872,456 818,459 2781,462 2632,465 739,473 972.3,475.4 1716,475 1532,478 3168,479 929,492 1342,492 1261,493 1466,493 1601,493 3082,494 1392,498 1214,499 3008,500 1112,502 314,503.33 1638,504 1155,507 818,510 2250,512 1078.1,518.1 2301,518 738,520 1938,520 1720,522 3110,531 2351,536 349,539 -57.7,545.3 87.1,546.8 418.12,552.39 1905,553 3031,563 2853,567 1720,573 304,576 109,588 3087,588 557,590 667,591 2502,591 2921,596 1754.81,607.33 1917,607 2562.12,608 1822,618 1530,620 1567.8,620.4 708,623 1357.4,627.6 2865,627 1264,629.1 1878,630 2791,635 678,636 782.07,645.46 2622,647.33 3028,650 2937,652 1778,669 2865,674 86.4,681.9 2353,724 2396,745 556,757.7 607,758 656,760 2951,766 3043,772 79,778 1633.4,780 2554,780 684,781 2498,785 2879,796 713,799 2924,803 3004,803 3085,803 3153,803 1978.22,805 2576,806 2395,812 1631.5,818.6 687,826 809,830 770,831 2320,831.33 728,835 2536,841 2464,848 2396,849 2036,856 2647,866 83,869 2497,877 1528,882.39 1387.4,899.2 1599.5,900.1 2593,914 1537,915 1496.1,916.9 2737,921 383.7,923.8 341,924 587,927 441,929 505,929 1855,933 1924,933 1628,941.4 663,945 2851,945 794,946 3117.8,946.3 725,948 2556,957 3009,962 3231,966 3286,966 41,968 2678,978 3372,981 404,985.39 2494,997 717,999 771,1021.39 390,1027 2385,1031 2334.64,1031.98 428.7,1054 2563,1084 681.89,1123.39 2601,1134 2354,1140 1305,1143.33 410,1145 709.89,1151.39 -51,1161.61 2499,1173.39 438,1174 734,1174 1901,1174 1671,1185.39 689.6,1187.99 494,1197 533,1197 721,1203 1908,1210 1743,1222.39 2489,1231 2364,1236 140,1255.33 -45,1262 1867,1272.39 2483,1282 1329,1302 1512,1305.39 538,1318 2060,1318.33 166,1320 598.9,1330.3 2369,1331 2494,1334 2331.73,1335.82 2060,1347 296.9,1357.1 -51,1366.3 1330,1371 1836,1377.39 157.3,1378.3 612,1385 1514.12,1387.39 2494,1395 -71,1430 1861,1433 19,1436 1896,1445 2488,1452 595.5,1456.8 1710,1463.33 157.3,1477.5 277,1481 1322.12,1490 2492,1506.39 -34,1519 1497,1523.39 1733,1525.39 1457,1531 323.2,1535.33 1829,1539 1909,1539 1300,1548.39 138,1555 -51,1571 357.3,1580.1 323.2,1583.33 323.2,1623.33 543.2,1631.33 393,1655.33 327,1684 702.29,1686.32 2239,1707.39 1673,1708.39 1544,1711.39 1858.12,1715 1278,1717.39 2065,1750 1295,1754.33 2516,1761.39 1905,1767.33 2146.12,1775 676.6,1815 1554.12,1824 252,1825 511,1826 1731,1842 818,1843.39 1688,1980 1902,2076 2060,2079.33 2189,2079.33 814,2127.33 2486,2128.39 -54,2135.3 609.2,2154.2 1673,2155.39 319.7,2159.2 926,2165.39 1277,2166.39 85,2199.39 1409,2246 1064,2247.33 791,2274 1997,2323.39 2499,2373.39 1665,2406 1994.12,2424.39 706.12,2465
IIC_SCL: J5.2 R8.2 U2.6 | length 387.7
  TopLayer w10: J5.2 393,1557 421.24,1585.24 U2.6 ; U2.6@495.02,1585.24 597.79,1585.24 R8.2
IIC_SDA: J5.1 R9.2 U2.5 | length 252
  TopLayer w10: J5.1 493.2,1407.53 U2.5 607.29,1535.24 R9.2
LED1: D2.2 P4.1 | length 221.5
  TopLayer w8: D2.2 2316.12,1838.27 P4.1
LED2: D3.2 P4.2 | length 223.3
  TopLayer w8: D3.2 2311.88,1912.27 P4.2
MCU_RXD: P9.6 U5.8 | length 1069.6
  TopLayer w10: U5.8 2710,636 v2(2748,598) ; P9.6 P9.6@3400,660
  BottomLayer w10: v2(2748,598) 2896,450 3400,450 3461,511 3461,589 P9.6
MCU_TXD: P9.4 U5.9 | length 1301.5
  TopLayer w10: v2(2690.31,605.69) U5.9
  BottomLayer w10: v2(2690.31,605.69) 2879,417 3445,417 3499,471 3499,644 3400,743 P9.4
NetD1_1: D1.1 R1.1 | length 84.5
  TopLayer w8: R1.1 D1.1
NetD2_1: D2.1 R2.2 | length 131
  TopLayer w8: R2.2 D2.1
NetD3_1: D3.1 R3.2 | length 131
  TopLayer w8: R3.2 D3.1
NetF1_1: F1.1 S2.2 | length 308.1
  TopLayer w20: S2.2 333.74,80.74 374,121 469.61,121 F1.1
NetP3_2: P3.2 R6.1 | length 342
  TopLayer w8: P3.2 390.61,860 596,860 611,845 R6.1
NetP5_1: P5.1 R12.1 | length 238.1
  TopLayer w8: R12.1 992.75,1832.73 1016.91,1856.89 1097.86,1856.89 1117.65,1876.68 P5.1
NetP5_2: P5.2 R13.1 R14.1 | length 223.2
  TopLayer w8: R14.1 R13.1 1160.96,1802.96 P5.2
NetP5_8: P5.8 R15.2 | length 144.2
  TopLayer w8: P5.8 1420.8,1815.52 R15.2
NetP12_A5: P12.A5 R25.1 | length 654.7
  TopLayer w8: P12.A5 2639.71,85.29 2670,55 2893,55 2944,106 R25.1
NetP12_B5: P12.B5 R24.1 | length 247.3
  TopLayer w8: P12.B5 2757.82,263.82 2830,336 2881,336 R24.1
NetP_HUSB1_A5: P_HUSB1.A5 R20.1 | length 975.3
  TopLayer w8: R20.1 1856.09,555.43 1870.39,541.13 1870.39,540.14 2149,261.54 2149,88 2119,58 1902,58 1870.29,89.71 P_HUSB1.A5
NetP_HUSB1_B5: P_HUSB1.B5 R21.1 | length 507.8
  TopLayer w8: R21.1 1788.1,515.9 1833,471 1902,471 1988.4,384.6 P_HUSB1.B5
NetP_USB_A5: P_USB.A5 R22.1 | length 222.5
  TopLayer w8: P_USB.A5 2051.31,2168.69 2070,2150 2070,2110 2112.81,2067.19 R22.1
NetP_USB_B5: P_USB.B5 R23.1 | length 199.6
  TopLayer w8: R23.1 1933.2,2018.39 P_USB.B5
NetR10_1: R10.1 R11.1 U4.1 | length 249
  TopLayer w10: R10.1 U4.1 R11.1
NetR16_2: R16.2 U6.8 | length 108.3
  TopLayer w10: U6.8 600.47,2030.7 R16.2
NRST: C11.2 P2.13 P8.4 R4.1 S1.1 U3.7 U5.4 | length 5794.2
  TopLayer w8: S1.1 55.39,290.39 v1(96,331) C11.2 ; P8.4 -6,726 22,698 22,401 55.61,367.39 C11.2 ; R4.1 C11.2 ; U3.7 1510.96,1019 v2(1536,1019) ; v2(1964,957) 1967,957 2040.91,883.09 P2.13 2179.39,890.49 2207.49,890.49 2247,930 2390,930 v2(2391,929) ; U5.4 2729.68,537.69 2746,554 2794,554 2822,582 v2(2822,774)
  BottomLayer w8: v1(96,331) 96,242 193,145 885,145 958,72 2116,72 2152,108 2152,242 2030,364 2030,730 2172,872 P2.13 ; v2(1536,1019) 1660,1143 1778,1143 v2(1964,957) ; v2(2391,929) 2510,929 2665,774 v2(2822,774)
PA0: P1.3 U3.10 | length 1100.1
  TopLayer w8: P1.3 943,1432.39 1122.61,1432.39 1193,1362 1193,949.5 1223.9,918.6 1310.6,918.6 1362,970 1362,1006.4 1382,1026.4 1420.04,1026.4 U3.10
PA1: P1.4 TK1.1 U3.11 | length 3712.1
  TopLayer w8: P1.4 1111.91,1383.09 1176,1319 1176,938.4 1213.6,900.8 1317.1,900.8 1380.1,963.8 1380.1,1000.3 1390.3,1010.5 1408.11,1010.5 U3.11
  TopLayer w10: P1.4 973.7,1383.09 923,1332.39 862,1332.39 826,1368.39 826,1545.39 893.61,1613 2873.02,1613 TK1.1
PA2: P1.5 R11.2 TK2.1 U3.12 | length 4363.1
  TopLayer w8: P1.5 917.7,1283.09 968,1333.39 1102,1333.39 1159,1276.39 1159,927 1202.6,883.4 1323.61,883.4 U3.12
  TopLayer w10: R11.2 749,1275.39 782.3,1308.7 ; P1.5 827.3,1283.09 801.7,1308.7 ; TK2.1 2732.98,1645 860.61,1645 792,1576.39 792,1318.39 ; 782.3,1308.7 792,1318.39 ; 782.3,1308.7 801.7,1308.7 ; 792,1318.39 801.7,1308.7
PA3: P1.6 R14.2 U3.13 | length 1281.6
  TopLayer w8: P1.6 1085.3,1283.09 1143,1225.39 1143,918.2 1198.81,862.39 1400.04,862.39 U3.13 ; R14.2 1077.02,1747.7 v1(1077.02,1714.55)
  BottomLayer w8: P1.6 1077.02,1366.41 v1(1077.02,1714.55)
PA4: P1.7 U3.14 | length 883.7
  TopLayer w8: P1.7 943,1232.39 1075,1232.39 1128,1179.39 1128,906.9 1189.51,845.39 1410.87,845.39 U3.14
PA5: P1.8 P5.5 U3.15 U4.6 | length 2403.8
  TopLayer w8: U4.6 U4.6@517.23,1051.16 ; P1.8 1062.3,1183.09 1113,1132.39 1113,894.39 1178,829.39 1422.71,829.39 U3.15 ; P5.5 1291,1941.79 v1(1291,1986.39)
  TopLayer w10: U4.6@517.23,1051.16 v1(582.6,1051.16)
  BottomLayer w8: P1.8 1091.7,1183.09 1136,1227.39 1136,1931 1191.39,1986.39 v1(1291,1986.39)
  BottomLayer w10: v1(582.6,1051.16) 667.77,1051.16 849,1232.39 ; 848.5,1232.39 944.4,1232.39 P1.8
PA6: P1.9 P5.7 U3.16 U4.2 | length 2918.2
  TopLayer w8: P1.9 944,1133.39 1047,1133.39 1096,1084.39 1096,885.39 1167,814.39 1435.55,814.39 U3.16 ; v1(1377,1895.39) 1377,1941.18 P5.7
  TopLayer w10: U4.2 316.89,1101.39 453.5,1238 738.79,1238 P1.9
  BottomLayer w8: P1.9 943.4,1033.39 1110,1033.39 1234,1157.39 1234,1842.39 1287,1895.39 v1(1377,1895.39)
PA7: P1.10 P5.3 U3.17 U4.5 | length 2274.8
  TopLayer w8: P1.10 1046.3,1083.09 1080,1049.39 1080,876.39 1158,798.39 1447.39,798.39 U3.17 ; v1(1204.26,1896.13) P5.3
  TopLayer w10: U4.5 517.43,1000.96 v1(581.43,1000.96)
  BottomLayer w8: P1.10 1110.7,1083.09 1204.26,1176.66 v1(1204.26,1896.13)
  BottomLayer w10: v1(581.43,1000.96) 653.57,1000.96 787.54,1134.93 941.86,1134.93 P1.10
PA8: P2.20 P5.9 U3.29 | length 3039.4
  TopLayer w8: v1(1464.11,1895.39) P5.9 ; v1(1622,1566.39) 2318.61,1566.39 2439,1446 2439,646 2376.09,583.09 P2.20 2217.3,528.39 2139.61,528.39 2002,666 1836.12,666 U3.29
  BottomLayer w8: v1(1464.11,1895.39) 1464.11,1619.29 1517,1566.39 v1(1622,1566.39)
PA9: P2.19 P9.3 U3.30 | length 2106.7
  TopLayer w8: U3.30 1845.96,684 2051,684 2141.57,593.43 2161.67,593.43 P2.19
  BottomLayer w8: P2.19 2223,634.09 2404.73,634.09 2480.63,710 3050,710 3264,496 3331,496 3350,515 3350,700 P9.3
PA10: P2.18 P9.5 U3.31 | length 1698.3
  TopLayer w8: U3.31 1857.8,700 2080,700 2147.41,632.59 2221.5,632.59 P2.18
  BottomLayer w8: P2.18 2395.09,683.09 2444,732 3111,732 3193,650 P9.5
PA11: P2.17 P_USB.A7 P_USB.B7 U3.32 | length 2316.6
  TopLayer w8: v1(1711.37,863.75) 1721.89,863.75 1864.64,721 2133.72,721 2171.63,683.09 P2.17 ; P_USB.A7@1991.48,2221.94 1991.48,2246.98 1999.6,2255.09 2022.6,2255.09 2030.85,2246.84 P_USB.B7@2030.85,2221.94 ; P_USB.B7@2030.85,2210.94 2030.85,2150.84 v1(2037.6,2144.09)
  BottomLayer w8: v1(1711.37,863.75) 1724.02,863.75 1772.77,815 1935,815 2030,910 2030,2136.49 v1(2037.6,2144.09)
PA12: P2.16 P_USB.A6 P_USB.B6 U3.33 | length 2398.6
  TopLayer w8: v1(1733.87,889.25) 1733.87,879.61 U3.33 1874.48,739 2227.91,739 P2.16 ; P_USB.B6 1971.8,2208.22 1971.8,2157.2 1981.85,2147.16 2001.94,2147.16 v1(2005,2144.09) ; v1@2005,2147.16 2005,2148.42 2009,2152.43 2011.13,2154.55 2011.13,2174.26 2011.13,2208.19 P_USB.A6@2011.17,2208.22 ; v1@2007.16,2146.26 v1@2011.17,2150.26 ; 2011.17,2174.26 P_USB.A6@2011.17,2208.22 ; P_USB.A6 P_USB.A6@2011.17,2208.22
  BottomLayer w8: v1(1733.87,889.25) 1733.87,876.52 1779.39,831 1928.37,831 2015,917.63 2015,2134.09 v1(2005,2144.09)
PA13: P2.15 P8.2 U3.34 | length 4224.5
  TopLayer w8: U3.34 1878.32,763 2141.91,763 2162,783.09 P2.15
  BottomLayer w8: P8.2 29,847 29,196 99,126 876,126 944,58 2143,58 2174,89 2174,254 2050,378 2050,705 2128.09,783.09 P2.15
PA14: P2.12 P8.3 U3.37 | length 4662.2
  TopLayer w8: U3.37 1839.26,995.39 2081.26,995.39 2143.65,933 2210,933 2260.09,983.09 P2.12
  BottomLayer w8: P8.3 9,767 9,172 77,104 868,104 929,43 2160,43 2199,82 2199,262 2068,393 2068,677 2123,732 2311.32,732 2352,772.68 2352,903.09 P2.12
PA15: P2.11 U3.38 | length 388.5
  TopLayer w8: U3.38 1828.42,1012.39 2142.7,1012.39 P2.11
PB0: P1.11 U3.18 | length 804.3
  TopLayer w8: P1.11 944,1033.39 1036,1033.39 1064,1005.39 1064,870.39 1150,784.39 1461.23,784.39 U3.18
PB1: P1.12 U3.19 | length 645
  TopLayer w8: P1.12 1046,930.79 1046,862.39 1140,768.39 1473.07,768.39 U3.19
PB3: P2.10 U3.39 | length 513.8
  TopLayer w8: U3.39 1819.59,1031.39 2220.3,1031.39 P2.10
PB4: P2.9 U3.40 | length 422
  TopLayer w8: U3.40 1810.75,1050.39 1966.22,1050.39 1998.92,1083.09 P2.9
PB5: P2.8 U3.41 | length 571.5
  TopLayer w8: U3.41 1799.91,1067.39 1949.48,1067.39 2013.08,1130.99 2219.9,1130.99 P2.8
PB6: P2.7 P_HUSB0.2 P_HUSB1.A7 P_HUSB1.B7 U3.42 | length 2392.8
  TopLayer w8: P_HUSB0.2 1145.8,331.02 1145.8,283.97 1170.37,259.39 1304,259.39 1380.2,335.59 1665.8,335.59 1703.21,373 1882,373 1931.96,323.04 1931.96,230.7 ; v1(1717.6,1003.39) 1717.6,1012.92 U3.42 1789.07,1084.39 1938.78,1084.39 2037.48,1183.09 P2.7 ; P_HUSB1.B7@1890.75,185.54 1890.75,215.94 1899,224.19 1925.45,224.19 ; P_HUSB1.A7@1931.96,181 1931.96,217.68 ; 1925.45,224.19 1931.96,224.19 ; 1925.45,224.19 1931.96,217.68 ; 1925.45,224.19 1931.96,230.7 ; 1931.96,217.68 1931.96,224.19 ; 1931.96,224.19 1931.96,230.7
  BottomLayer w8: v1(1691.6,361.39) 1682.6,370.39 1682.6,980.58 1705.41,1003.39 v1(1717.6,1003.39)
PB7: P2.6 P_HUSB0.3 P_HUSB1.A6 P_HUSB1.B6 U3.43 | length 2602.6
  TopLayer w8: P_HUSB0.3 1161.8,331.02 1161.8,290.6 1177,275.39 1297.37,275.39 1373.57,351.59 1647.8,351.59 v1(1657.6,361.39) 1683.21,387 1887.8,387 1949.03,325.77 1949.03,128.57 1949.8,127.8 1941.5,119.49 1918.7,119.49 1909.66,128.54 P_HUSB1.A6 ; v1(1694.6,1027.39) 1704.23,1027.39 U3.43 1777.23,1100.39 1925.54,1100.39 2057.14,1231.99 2220.9,1231.99 P2.6
  BottomLayer w8: v1(1657.6,361.39) 1666.6,370.39 1666.6,987.21 1694.6,1015.21 v1(1694.6,1027.39)
PB8: P2.5 U3.45 U6.4 | length 3246.2
  TopLayer w8: v1(221,1881) 272.9,1881 U6.4 ; U3.45 1738.55,1117.39 1914.11,1117.39 1973.12,1176.4 v1(1973.12,1283) 2171.91,1283 P2.5
  BottomLayer w8: v1(221,1881) 221,2008 274,2061 1814,2061 1973.12,1901.88 v1(1973.12,1283)
PB9: P2.3 U3.46 U6.1 | length 2957.4
  TopLayer w8: U6.1 v1(329.3,2030.7) ; U3.46 1728.71,1135.39 1903.39,1135.39 1946.12,1178.12 v1(1946.12,1383) 2171.91,1383 P2.3
  BottomLayer w8: v1(329.3,2030.7) 1812.3,2030.7 1946.12,1896.88 v1(1946.12,1383)
PB10: P1.14 U3.21 | length 597.3
  TopLayer w8: P1.14 1129.4,747.39 1507.75,747.39 U3.21
PB11: P1.15 U3.22 | length 715.6
  TopLayer w8: P1.15 942,831.39 1018,831.39 1116,733.39 1521.59,733.39 U3.22
PB12: P1.16 U3.25 | length 867.9
  TopLayer w8: P1.16 1039.3,783.09 1235,587.39 1597.4,587.39 1687,676.99 1687,703.77 U3.25
PB13: P1.17 U3.26 | length 1016.5
  TopLayer w8: P1.17 942,731.39 1066,731.39 1225.6,571.79 1607.2,571.79 1704,668.59 1704,714.61 U3.26
PB14: P1.18 U3.27 | length 932.1
  TopLayer w8: P1.18 1088.3,683.09 1219,552.39 1614.4,552.39 1723,660.99 1723,723.44 U3.27
PB15: P1.19 U3.28 | length 1086.2
  TopLayer w8: P1.19 943,632.39 1114,632.39 1211.4,534.99 1623.6,534.99 1743,654.39 1743,731.28 U3.28
PC13: P2.4 U3.2 | length 1304.2
  TopLayer w8: U3.2 1534,1135.15 1534,1199.39 1575,1240.39 1689,1240.39 1749,1300.39 1749,1417 1841.39,1509.39 2085,1509.39 2120.1,1544.49 2304.3,1544.49 2339.01,1509.78 2339.01,1406.38 2315.72,1383.09 P2.4
PC14: C5.1 U3.3 Y2.1 | length 421
  TopLayer w8: U3.3 1518,1123.32 1518,1216.39 1560,1258.39 1624,1258.39 Y2.1 C5.1
PC15: C6.1 U3.4 Y2.2 | length 362.5
  TopLayer w8: U3.4 1504,1109.48 1504,1236.82 Y2.2 C6.1@1579.57,1408.37
PD0: C7.2 P1.1 U3.5 Y1.2 | length 1045.9
  TopLayer w8: P1.1 893.7,1527.09 921,1554.39 1175.61,1554.39 1252.17,1477.83 C7.2 1400.37,1423.1 Y1.2 1455.6,1368.07 1455.6,1130.04 U3.5 ; Y1.2@1401.25,1439.98 Y1.2@1401.47,1440.2
PD1: C8.2 P1.2 U3.6 Y1.1 | length 821.9
  TopLayer w8: P1.2 1141.91,1483.09 1210,1415 1210,1240 1226.8,1223.2 C8.2 Y1.1 ; Y1.1@1401.35,1240.08 Y1.1@1401.47,1239.96 ; Y1.1@1401.47,1223.2 1401.47,1156.33 U3.6
UD+: P12.A6 P12.B6 U5.1 | length 523.4
  TopLayer w8: U5.1 2670.63,340.53 2679.08,332.08 P12.A6 ; P12.B6 2718.45,216.45 2735,233 2735,280 v2(2737,282)
  BottomLayer w8: v2(2674,282) 2675.5,280.5 2735.5,280.5 v2@2737,279
UD-: P12.A7 P12.B7 U5.2 | length 479.2
  TopLayer w8: v2(2647,245) 2647,243.65 2659.39,231.25 P12.B7 ; U5.2 2690.31,347.69 2698.76,339.24 2698.76,256.65 2705,250.41 v2(2705,245) ; P12.A7 v2@2698.76,245
  BottomLayer w8: v2(2647,245) v2@2704,245
VBAT: C14.1 P2.1 U3.1 | length 893.3
  TopLayer w10: U3.1 1552,1144.99 1552,1187.39 1586,1221.39 1696,1221.39 1747,1272.39 C14.1
  TopLayer w15: C14.1 1784,1417.39 1849.7,1483.09 P2.1
VDDA: C15.1 R7.2 U3.9 | length 243.5
  TopLayer w9: R7.2 C15.1 1418.89,1055.39 U3.9
pads on no net: P12.A8 P12.B8 P_HUSB1.A8 P_HUSB1.B8 P_USB.A8 P_USB.B8 S2.0 S2.3 U1. U3.0 U5.5 U6.5

## Polygon pours and split planes (outlines as drawn)
GND on TopLayer "Top Layer-No Net" (hatched 90Degree grid 8 track 8, remove dead copper, pour order 4): -165,2526.39 2605,2526.39 2620,2511.39 2620,1033.49 3598,1033.49 3598,-103.61 3568,-133.61 3561,-140.61 3436,-140.61 -88,-140.61 -126,-102.61 -140,-88.61 -140,-43.61 -140,2499.39 -167,2526.39
GND on BottomLayer "Top Layer-No Net" (hatched 90Degree grid 8 track 8, remove dead copper, pour order 3): -165,2526.39 2605,2526.39 2620,2511.39 2620,1033.49 3598,1033.49 3598,-103.61 3568,-133.61 3561,-140.61 3436,-140.61 -88,-140.61 -126,-102.61 -140,-88.61 -140,-43.61 -140,2499.39 -167,2526.39

## Keep-outs
KeepOutLayer:
  the board outline again, w8

## Other copper
TopLayer:
  pour cut-out: 1215,1585 1215,1535 1250,1500 1265.71,1500 1265.71,1579.29 1260,1585
  pour cut-out: 760,1690 2655,1690 2655,1568 786,1568 786,1321 749,1284 734,1284 724,1294 724,1654
  pour cut-out: 2653,1539 2229,1539 2200,1568 1227,1568 1211,1552 956,1552 939,1535 939,1384 907,1352 848,1352 829,1371 829,1540 893,1604 2653,1604

## Silkscreen, mask and mechanical layers (free items; w line width, h text height)
TopOverlay:
  drawing of 995 lines, arcs and shapes, not listed
  text "CAN" at 641,2365.39 h70
  text "TouchKey" at 2777,2365.39 h70
  text "GND" at -123,2013.39 h32 r270
  text "3V3" at 134,1990.39 h50 r270
  text "LED1" at 2393,1913.39 h32
  text "LED2" at 2393,1813.39 h32
  text "5V" at 134,1765.39 h50 r270
  text "GND" at -123,1719.39 h32 r270
  text "PD0" at 744.98,1467.39 h32
  text "PD1" at 1064,1467.39 h32
  text "VBAT" at 1994,1467.39 h32
  text "3V3" at 2341,1467.39 h32
  text "SCL" at 250.1,1392.7 h32
  text "SDA" at 555.1,1392.7 h32
  text "PA0" at 744.98,1367.39 h32
  text "PA1" at 1064,1367.39 h32
  text "PB9" at 2023.99,1367.39 h32
  text "PC13" at 2341,1367.39 h32
  text "PA2" at 744.98,1267.39 h32
  text "PA3" at 1064,1267.39 h32
  text "PB8" at 2023.99,1267.39 h32
  text "PB7" at 2341,1267.39 h32
  text "PA4" at 744.98,1166.39 h32
  text "PA5" at 1064,1166.39 h32
  text "PB6" at 2023.99,1166.39 h32
  text "PB5" at 2341,1166.39 h32
  text "PA6" at 744.98,1067.39 h32
  text "PA7" at 1064,1067.39 h32
  text "PB4" at 2023.99,1067.39 h32
  text "PB3" at 2341,1067.39 h32
  text "+5V" at 14,1008 h32
  text "PB0" at 744.98,969.39 h32
  text "PB1" at 1064,969.39 h32
  text "PA15" at 1999,969.39 h32
  text "PA14" at 2341,969.39 h32
  text "SDIO" at 14,913 h32
  text "NRST" at 1994,882.39 h32
  text "GND" at 2341,882.39 h32
  text "GND" at 284,874.39 h32
  text "BOOT1" at 391,874.39 h32
  text "BOOT1" at 695,867.39 h32
  text "PB10" at 1064,867.39 h32
  text "3V3" at 3134,833.92 h32
  text "3V3" at 3469.11,833.92 h32
  text "SCLK" at 14,812 h32
  text "PB11" at 729.99,767.39 h32
  text "PB12" at 1064,767.39 h32
  text "PA13" at 1999,762.39 h32
  text "PA12" at 2341,762.39 h32
  text "TX1" at 3144.66,735.92 h32
  text "T1_I" at 3469.11,735.92 h32
  text "NRST" at 14,712 h32
  text "PB13" at 719.99,665.39 h32
  text "PB14" at 1064,665.39 h32
  text "PA11" at 2009,665.39 h32
  text "PA10" at 2341,665.39 h32
  text "RX1" at 3144.66,636.92 h32
  text "R1_O" at 3469.11,636.92 h32
  text "GND" at 14,611 h32
  text "DTR" at 284,610.39 h32
  text "BOOT0" at 391,610.39 h32
  text "PB15" at 719.99,569.39 h32
  text "3V3" at 1064,569.39 h32
  text "PA9" at 2023.99,569.39 h32
  text "PA8" at 2341,569.39 h32
  text "GND" at 3134,532.92 h32
  text "GND" at 3469.11,532.92 h32
  text "沁恒微电子" at 1859,405.21 h90
  text "http://wch.cn" at 1860.79,332.21 h80
  text "CH32x203C-R1-1v0" at 2973,210 h35
  text "RST" at -108,207.39 h40
  text "ON" at 308,55.33 h32
  text "OFF" at 467,55.33 h32
Mechanical1:
  the board outline again, w8

## Text inside footprints (layer, text, board x,y; h text height)
D1: TopOverlay "+" at 667,102.39 h32 r180
D2: TopOverlay "+" at 2015,1823.27 h32 r90
D3: TopOverlay "+" at 2015,1897.27 h32 r90
P_HUSB0: TopOverlay "G" at 1276,242.39 h32; TopOverlay "V" at 996,242.39 h32; TopOverlay "D+" at 1166,242.39 h32; TopOverlay "D-" at 1076,242.39 h32